# Altium PCB rpi_pico_2_hat.PcbDoc (part 1 of 2)
Units mil, origin at the board's own origin, x right, y up, seen from the top; angles counter-clockwise.
Board outline 970.71 x 2205.08 mil, 4 copper layers (Top Layer, Ground Plane, Middle Layer, Bottom Layer), stack 61.368 mil thick; 73 components, 64 nets, 231 pads, 151 vias.
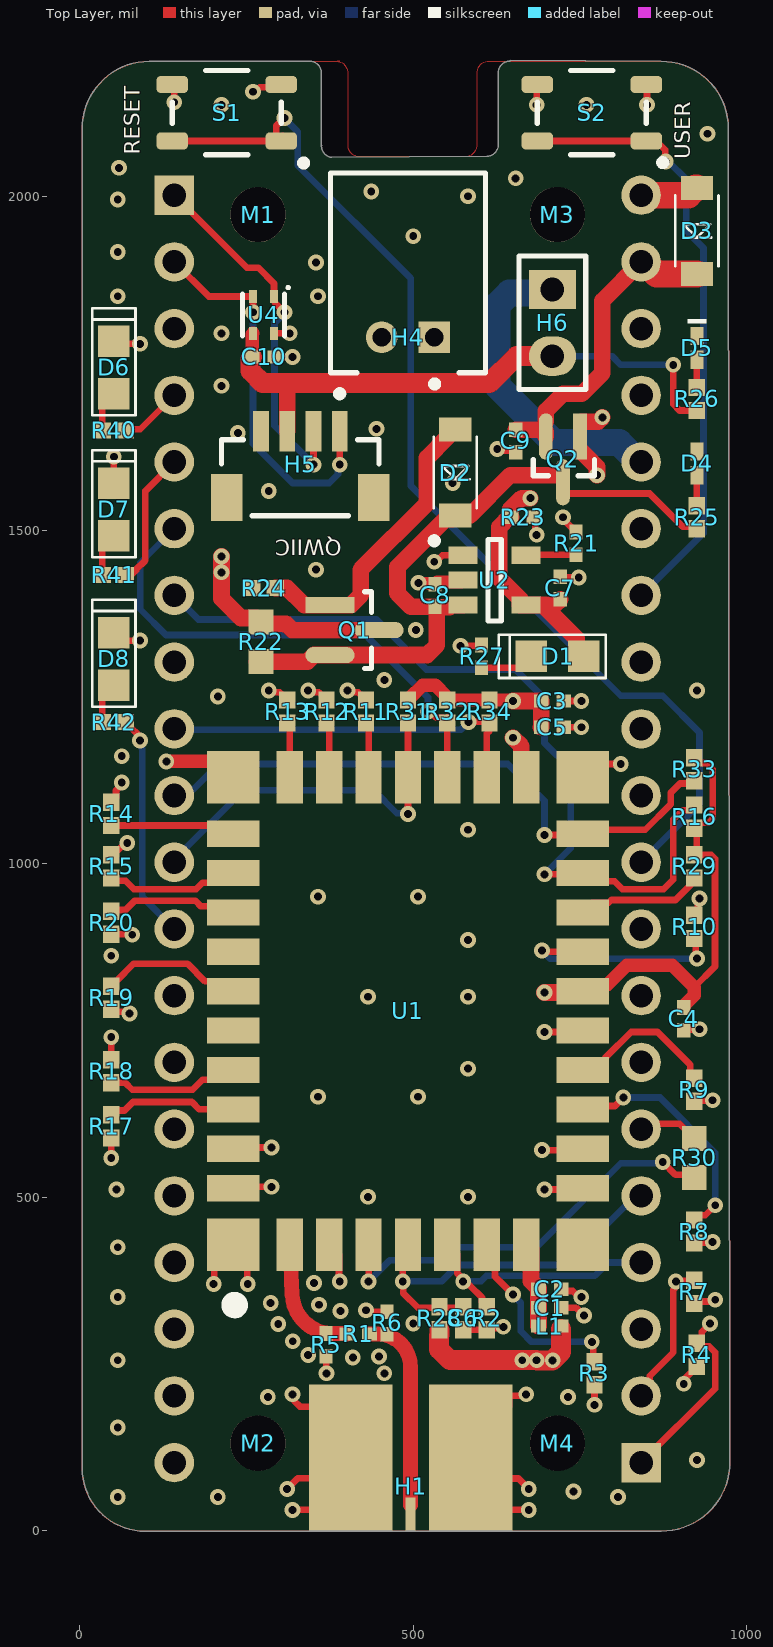
[diagram p0: Top Layer view]
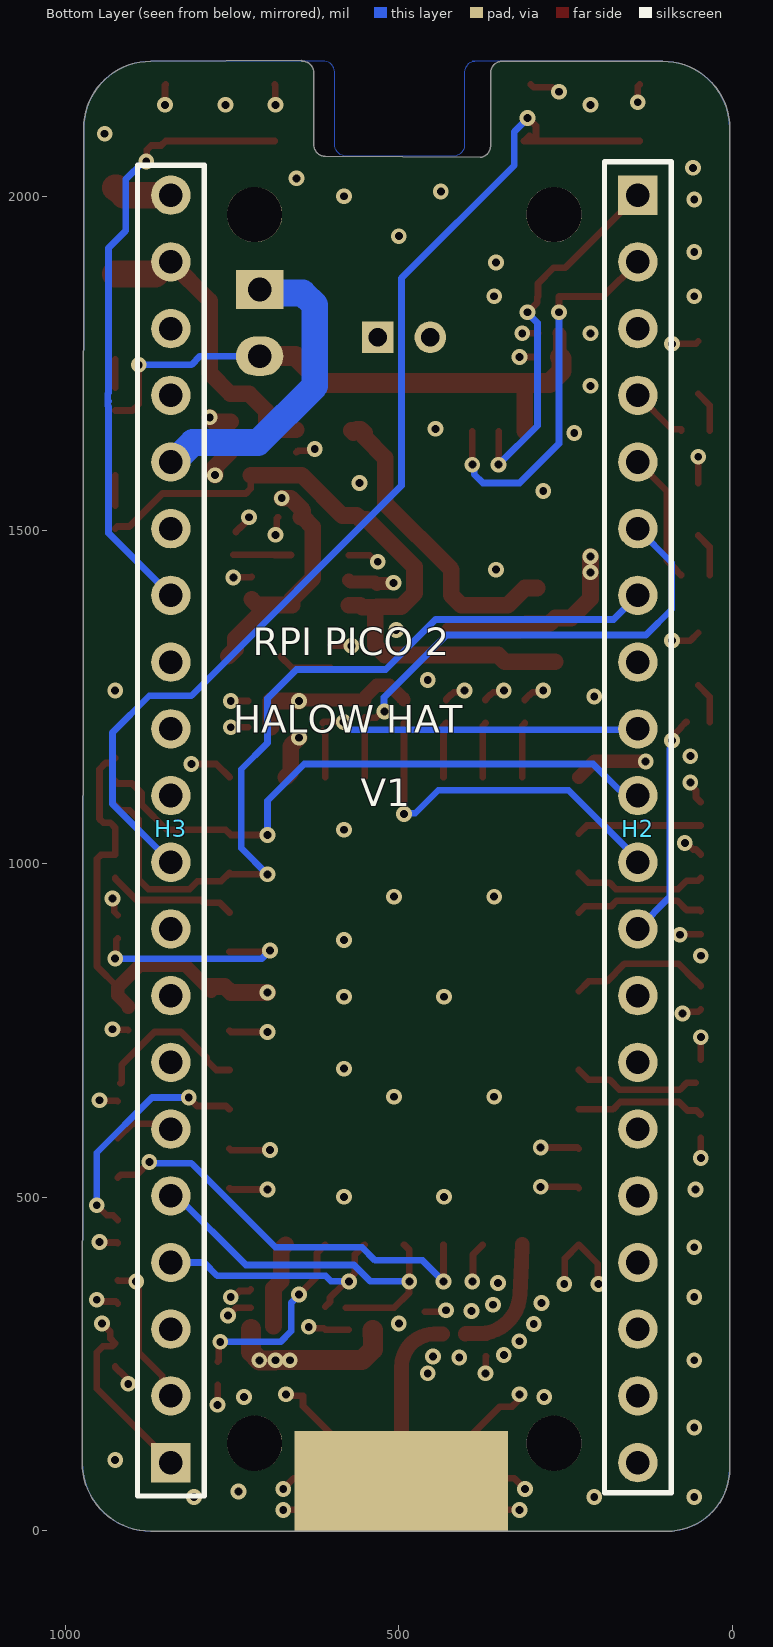
[diagram p1: Bottom Layer view, seen from below]
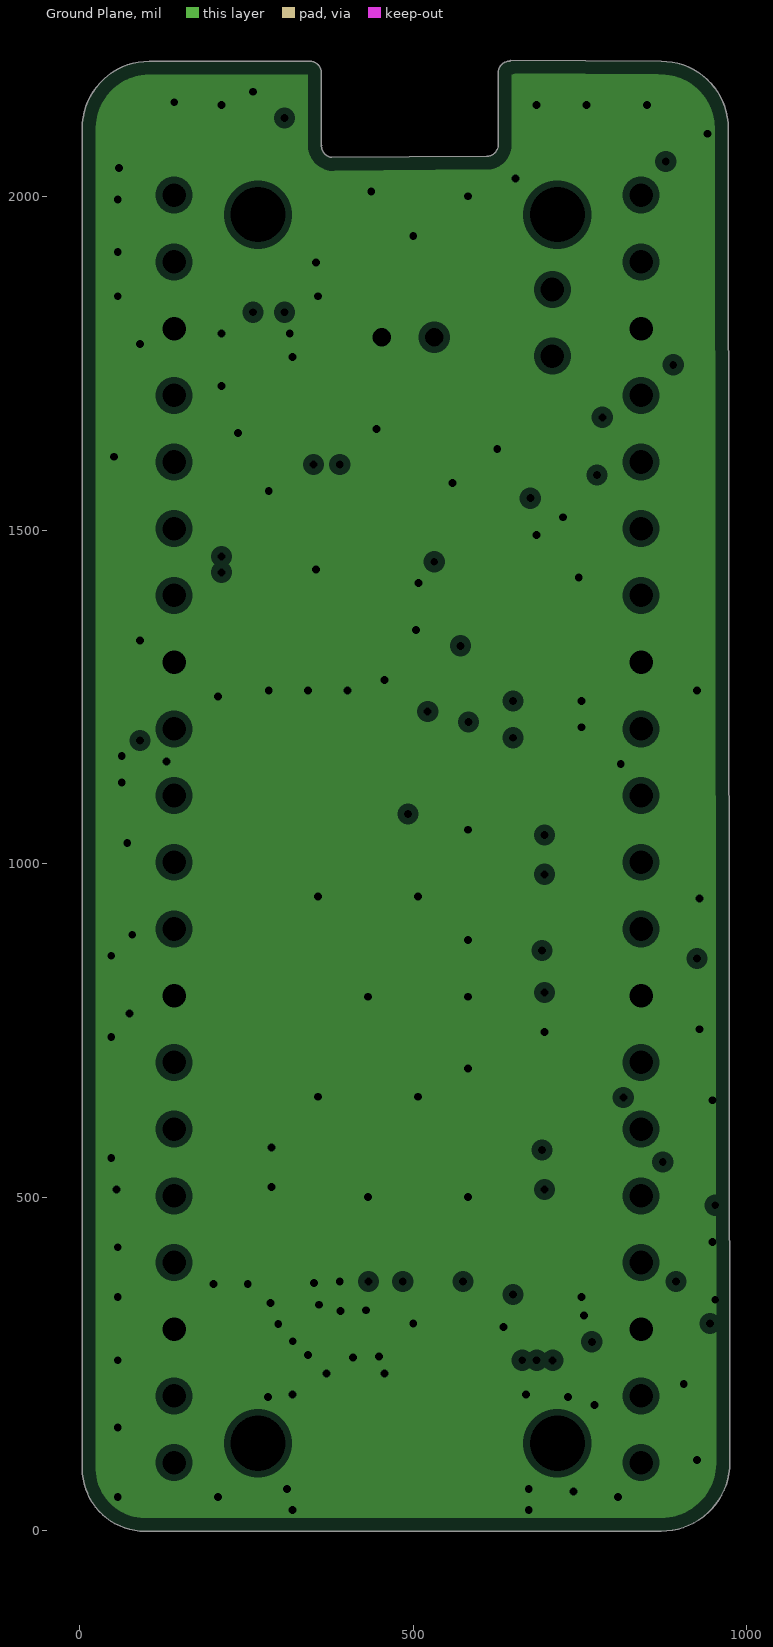
[diagram p2: Ground Plane, clearances drawn from the general rule]
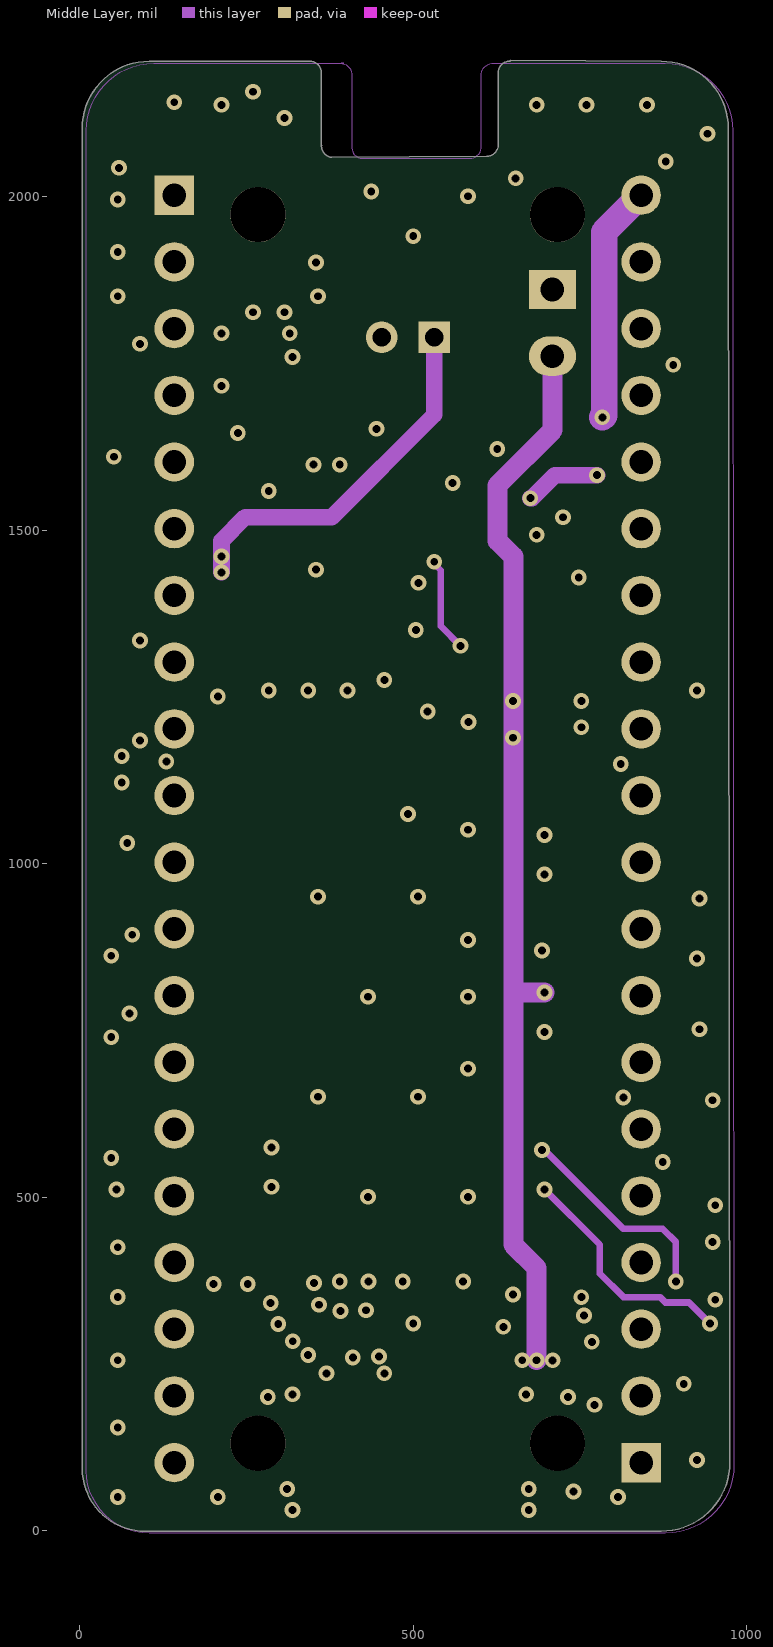
[diagram p3: Middle Layer]

## Layer stack, top to bottom
Top Solder: solder mask 0.8, SM-001, Dk 4.2
Top Layer: signal copper 1.378
Dielectric 2: prepreg 16.117, PP-006, Dk 4.29
Ground Plane: plane copper 1.378, net GND
Dielectric 1: prepreg 23.622, Core, Dk 4.29
Middle Layer: signal copper 1.378
Dielectric 5: prepreg 16.117, PP-006, Dk 4.29
Bottom Layer: signal copper 1.378
Bottom Solder: solder mask 0.8, SM-001, Dk 4.2

## Board outline
3.84,93.63 3.84,2102.36 cw(c104.56,2102.36) 104.56,2203.08 346.46,2203.08 cw(c345.31,2186.19) 362.2,2185.04 362.2,2074.8 362.51,2077.07 ccw(c379.41,2075.93) 377.95,2059.06 377.95,2058.93 610.08,2060.65 610.08,2060.53 ccw(c609.75,2078.41) 627.63,2078.74 627.63,2187.33 cw(c644.52,2186.19) 645.67,2203.08 645.68,2204.62 871.72,2203.08 cw(c871.72,2102.36) 972.44,2102.36 974.55,102.36 cw(c871.72,102.36) 871.72,-0.46 97.93,-0.46 cw(c97.93,93.63)

## Design rules (kind name [scope] priority, off if disabled: settings)
AssemblyTestPointUsage [All] p0: scope1count=1 scope1_0_kind=Board scope1_0_value=Board scope2count=1 scope2_0_kind=Board scope2_0_value=Board commentlength=0
AssemblyTestPointUsage [All] p1: allowmultiple=TRUE
AssemblyTestpoint [All] p0: scope1count=1 scope1_0_kind=Board scope1_0_value=Board scope2count=1 scope2_0_kind=Board scope2_0_value=Board commentlength=0
AssemblyTestpoint [All] p1: testpointundercomponent=TRUE minsize=40 maxsize=100 preferedsize=60 minholesize=0 maxholesize=40 preferedholesize=32 testpointgrid=1 usegrid=FALSE gridtolerance=0.01 allowsidetop=TRUE
BoardOutlineClearance [All] p0 off: scope1count=1 scope1_0_kind=Board scope1_0_value=Board scope2count=1 scope2_0_kind=Board scope2_0_value=Board commentlength=140 gap=15 // Protel DXP Scope 1 Expression Was: (not OnTopSilkscreen) AND (NOT OnBottomSilkscreen) and (not OnMultiLayer) and (not InComponent('H1'))
BoardOutlineClearance [(not OnTopSilkscreen) AND (NOT OnBottomSilkscreen) and (not OnMultiLayer) and (not InComponent('H1'))] p1: gap=15 ignorepadtopadclearanceinfootprint=FALSE
Clearance Clearance_1 [All] p0: scope1count=1 scope1_0_kind=Board scope1_0_value=Board scope2count=1 scope2_0_kind=Board scope2_0_value=Board commentlength=0 gap=6
Clearance Clearance_USB [All] p0 off: scope1count=1 scope1_0_kind=Board scope1_0_value=Board scope2count=1 scope2_0_kind=Board scope2_0_value=Board commentlength=65 gap=6 // Protel DXP Scope 1 Expression Was: InDifferentialPair('USBC')
Clearance Clearance_RF [All] p0: scope1count=1 scope1_0_kind=NetClass scope1_0_value="50 Ohms" scope2count=1 scope2_0_kind=Board scope2_0_value=Board commentlength=0 gap=10
Clearance Clearance_RF_Poly [All] p0 off: scope1count=1 scope1_0_kind=Board scope1_0_value=Board scope2count=1 scope2_0_kind=NetClass scope2_0_value=RF-Net commentlength=50 gap=10 // Protel DXP Scope 1 Expression Was: (InPolygon)
Clearance Clearance_RF_Poly [(InPolygon) vs InNetClass('RF-Net')] p1: gap=10 ignorepadtopadclearanceinfootprint=TRUE
Clearance Clearance_RF [InNetClass('50 Ohms')] p2: gap=10 ignorepadtopadclearanceinfootprint=TRUE
Clearance Clearance_USB [InDifferentialPair('USBC')] p3: gap=6 ignorepadtopadclearanceinfootprint=TRUE
Clearance Clearance_1 [All] p4: gap=6 ignorepadtopadclearanceinfootprint=TRUE
ComponentClearance [All] p0: scope1count=1 scope1_0_kind=Board scope1_0_value=Board scope2count=1 scope2_0_kind=Board scope2_0_value=Board commentlength=0 gap=10 collisioncheckmode=3
DiffPairsRouting DiffPairsRouting_USBC [All] p0 off: scope1count=1 scope1_0_kind=Board scope1_0_value=Board scope2count=1 scope2_0_kind=Board scope2_0_value=Board commentlength=65 // Protel DXP Scope 1 Expression Was: InDifferentialPair('USBC')
DiffPairsRouting DiffPairsRouting_USBC [InDifferentialPair('USBC')] p1 off: maxlimit=10 minlimit=5 mostfreqgap=10 toplayer_maxgap=6 toplayer_prefgap=6 toplayer_minwidth=7.75 toplayer_maxwidth=11 toplayer_prefwidth=10.26 midlayer1_minwidth=15 midlayer1_maxwidth=15 midlayer1_prefwidth=15 bottomlayer_minwidth=15 bottomlayer_maxwidth=15 bottomlayer_prefwidth=15 impedanceprofiledriven=TRUE maxuncoupledlength=500
FabricationTestPointUsage [All] p0 off: scope1count=1 scope1_0_kind=Board scope1_0_value=Board scope2count=1 scope2_0_kind=Board scope2_0_value=Board commentlength=0 valid=0 allowmultiple=FALSE
FabricationTestPointUsage [All] p1 off: valid=0 allowmultiple=FALSE
FabricationTestpoint [All] p0 off: scope1count=1 scope1_0_kind=Board scope1_0_value=Board scope2count=1 scope2_0_kind=Board scope2_0_value=Board commentlength=63 side=1 testpointundercomponent=TRUE minsize=40 maxsize=100 preferedsize=60 minholesize=0 maxholesize=40 preferedholesize=32 testpointgrid=1 // Protel DXP Scope 1 Expression Was: (IsPad And OnMultiLayer)
FabricationTestpoint [(IsPad And OnMultiLayer)] p1 off: side=1 testpointundercomponent=TRUE minsize=40 maxsize=100 preferedsize=60 minholesize=0 maxholesize=40 preferedholesize=32 testpointgrid=1 allowsidetop=TRUE usegrid=TRUE gridtolerance=0.01
FanoutControl Fanout_Default [All] p0 off: scope1count=1 scope1_0_kind=Board scope1_0_value=Board scope2count=1 scope2_0_kind=Board scope2_0_value=Board commentlength=30 // Fanout_Default (Default Rule)
FanoutControl Fanout_Small [All] p0 off: scope1count=1 scope1_0_kind=Board scope1_0_value=Board scope2count=1 scope2_0_kind=Board scope2_0_value=Board commentlength=84 // Protel DXP Scope 1 Expression Was: (CompPinCount < 5)   Fanout_Small (Default Rule)
FanoutControl Fanout_SOIC [All] p0 off: scope1count=1 scope1_0_kind=Board scope1_0_value=Board scope2count=1 scope2_0_kind=Board scope2_0_value=Board commentlength=71 // Protel DXP Scope 1 Expression Was: IsSOIC   Fanout_SOIC (Default Rule)
FanoutControl Fanout_LCC [All] p0 off: scope1count=1 scope1_0_kind=Board scope1_0_value=Board scope2count=1 scope2_0_kind=Board scope2_0_value=Board commentlength=69 // Protel DXP Scope 1 Expression Was: IsLCC   Fanout_LCC (Default Rule)
FanoutControl Fanout_BGA [All] p0 off: scope1count=1 scope1_0_kind=Board scope1_0_value=Board scope2count=1 scope2_0_kind=Board scope2_0_value=Board commentlength=69 // Protel DXP Scope 1 Expression Was: IsBGA   Fanout_BGA (Default Rule)
FanoutControl Fanout_BGA [IsBGA] p1 off: bgadir=Out bgaviamode=Centered fanoutstyle=Auto fanoutdirection=Alternating viagrid=1 // Fanout_BGA (Default Rule)
FanoutControl Fanout_LCC [IsLCC] p2 off: bgadir=Out bgaviamode=Centered fanoutstyle=Auto fanoutdirection=Alternating viagrid=1 // Fanout_LCC (Default Rule)
FanoutControl Fanout_SOIC [IsSOIC] p3 off: bgadir=Out bgaviamode=Centered fanoutstyle=Auto fanoutdirection=Alternating viagrid=1 // Fanout_SOIC (Default Rule)
FanoutControl Fanout_Small [(CompPinCount < 5)] p4 off: bgadir=Out bgaviamode=Centered fanoutstyle=Auto fanoutdirection=OutThenIn viagrid=1 // Fanout_Small (Default Rule)
FanoutControl Fanout_Default [All] p5 off: bgadir=Out bgaviamode=Centered fanoutstyle=Auto fanoutdirection=Alternating viagrid=1 // Fanout_Default (Default Rule)
Height [All] p0 off: scope1count=1 scope1_0_kind=Board scope1_0_value=Board scope2count=1 scope2_0_kind=Board scope2_0_value=Board commentlength=0
Height "Under Socket" [All] p0 off: scope1count=1 scope1_0_kind=Board scope1_0_value=Board scope2count=1 scope2_0_kind=Board scope2_0_value=Board commentlength=64 // Protel DXP Scope 1 Expression Was: WithinRoom('ROOM_SOCKET')
Height "POGO Pins" [All] p0: scope1count=1 scope1_0_kind=ComponentClass scope1_0_value=POGO scope2count=1 scope2_0_kind=Board scope2_0_value=Board commentlength=0
Height TP1 [All] p0: scope1count=1 scope1_0_kind=Component scope1_0_value=TP1 scope2count=1 scope2_0_kind=Board scope2_0_value=Board commentlength=0
Height TP1 [InComponent('TP1')] p1: minheight=0 maxheight=472.44 prefheight=118.11
Height "POGO Pins" [InComponentClass('POGO')] p2: minheight=0 maxheight=275.59 prefheight=196.85
Height "Under Socket" [WithinRoom('ROOM_SOCKET')] p3: minheight=0 maxheight=157.48 prefheight=118.11
Height [All] p4 off: minheight=0 maxheight=1000 prefheight=500
HoleSize [All] p0: scope1count=1 scope1_0_kind=Board scope1_0_value=Board scope2count=1 scope2_0_kind=Board scope2_0_value=Board commentlength=0 absolutevalues=TRUE maxlimit=200 minlimit=6 maxpercent=80.000 minpercent=20.000
HoleSize [All] p1: absolutevalues=TRUE maxlimit=200 minlimit=6 maxpercent=80.000 minpercent=20.000
HoleToHoleClearance [All] p0: scope1count=1 scope1_0_kind=Board scope1_0_value=Board scope2count=1 scope2_0_kind=Board scope2_0_value=Board commentlength=0
HoleToHoleClearance [All] p1: gap=8 allowstackedmicrovias=TRUE
LayerPairs [All] p0 off: scope1count=1 scope1_0_kind=Board scope1_0_value=Board scope2count=1 scope2_0_kind=Board scope2_0_value=Board commentlength=0 enforce=TRUE
LayerPairs [All] p1 off: enforce=TRUE
MatchedLengths SDIO_2 [All] p0: scope1count=1 scope1_0_kind=NetClass scope1_0_value=SDIO_2 scope2count=1 scope2_0_kind=Board scope2_0_value=Board commentlength=0 tolerance=2000 amplitude=200 gap=20 style=90-Degree
MatchedLengths DCMI [All] p0: scope1count=1 scope1_0_kind=NetClass scope1_0_value=DCMI scope2count=1 scope2_0_kind=Board scope2_0_value=Board commentlength=0 tolerance=1000 amplitude=200 gap=20 style=90-Degree
MatchedLengths SDIO [All] p0: scope1count=1 scope1_0_kind=NetClass scope1_0_value=SDIO scope2count=1 scope2_0_kind=Board scope2_0_value=Board commentlength=0 tolerance=2000 amplitude=200 gap=20 style=90-Degree
MatchedLengths MatchLengths_U1_Passives_J5 [All] p0 off: scope1count=1 scope1_0_kind=Board scope1_0_value=Board scope2count=1 scope2_0_kind=Board scope2_0_value=Board commentlength=98 tolerance=50 amplitude=200 gap=20 style=90-Degree // Protel DXP Scope 1 Expression Was: InxSignalClass('xSignals_U1_Passives_J5_MatchLengthsClass')
MatchedLengths MatchLengths_U1_Passives_J5_1 [All] p0 off: scope1count=1 scope1_0_kind=Board scope1_0_value=Board scope2count=1 scope2_0_kind=Board scope2_0_value=Board commentlength=100 tolerance=50 amplitude=200 gap=20 style=90-Degree // Protel DXP Scope 1 Expression Was: InxSignalClass('xSignals_U1_Passives_J5_MatchLengthsClass_1')
MatchedLengths DCMI [InNetClass('DCMI')] p1: tolerance=1000 checknetsindiffpair=FALSE checkdiffpairvsdiffpair=TRUE checkxsignals=TRUE checkothers=TRUE
MatchedLengths SDIO [InNetClass('SDIO')] p2: tolerance=2000 checknetsindiffpair=FALSE checkdiffpairvsdiffpair=TRUE checkxsignals=TRUE checkothers=TRUE
MatchedLengths SDIO_2 [InNetClass('SDIO_2')] p3: tolerance=2000 checknetsindiffpair=FALSE checkdiffpairvsdiffpair=TRUE checkxsignals=TRUE checkothers=TRUE
MatchedLengths MatchLengths_U1_Passives_J5_1 [InxSignalClass('xSignals_U1_Passives_J5_MatchLengthsClass_1')] p4: tolerance=50 checknetsindiffpair=FALSE checkdiffpairvsdiffpair=TRUE checkxsignals=TRUE checkothers=TRUE
MatchedLengths MatchLengths_U1_Passives_J5 [InxSignalClass('xSignals_U1_Passives_J5_MatchLengthsClass')] p5: tolerance=50 checknetsindiffpair=FALSE checkdiffpairvsdiffpair=TRUE checkxsignals=TRUE checkothers=TRUE
MinimumSolderMaskSliver [All] p0 off: scope1count=1 scope1_0_kind=Board scope1_0_value=Board scope2count=1 scope2_0_kind=Board scope2_0_value=Board commentlength=96 // Protel DXP Scope 1 Expression Was: not InComponent('U4','U1','U5','U6','U7','U8','U9','U10')
MinimumSolderMaskSliver [not InComponent('U4','U1','U5','U6','U7','U8','U9','U10')] p1: minsoldermaskwidth=1
NetAntennae [All] p0: scope1count=1 scope1_0_kind=Board scope1_0_value=Board scope2count=1 scope2_0_kind=Board scope2_0_value=Board commentlength=0
PasteMaskExpansion [All] p0: scope1count=1 scope1_0_kind=Board scope1_0_value=Board scope2count=1 scope2_0_kind=Board scope2_0_value=Board commentlength=0 expansion=0
PlaneClearance [All] p0: scope1count=1 scope1_0_kind=Board scope1_0_value=Board scope2count=1 scope2_0_kind=Board scope2_0_value=Board commentlength=0 clearance=10
PlaneClearance [All] p1: clearance=10
PlaneConnect [All] p0: scope1count=1 scope1_0_kind=Board scope1_0_value=Board scope2count=1 scope2_0_kind=Board scope2_0_value=Board commentlength=0 planeconnectstyle=Relief reliefexpansion=20 reliefentries=4 reliefconductorwidth=10 reliefairgap=10
PlaneConnect PlaneConnect_1 [All] p0 off: scope1count=1 scope1_0_kind=Board scope1_0_value=Board scope2count=1 scope2_0_kind=Board scope2_0_value=Board commentlength=166 planeconnectstyle=Relief reliefexpansion=15.75 reliefentries=4 reliefconductorwidth=10 reliefairgap=7.87 // Protel DXP Scope 1 Expression Was: (InComponent('J5') OR InComponent('J6') OR InComponent('J13') OR InComponent('J11') OR InComponent('J12')) OR InComponent('H3')
PlaneConnect PlaneConnect_1 [(InComponent('J5') OR InComponent('J6') OR InComponent('J13') OR InComponent('J11') OR InComponent('J12')) OR InComponent('H3')] p1: planeconnectstyle=Relief reliefexpansion=15.75 reliefentries=4 reliefconductorwidth=10 reliefairgap=7.87
PlaneConnect [All] p2: pad.planeconnectstyle=Relief pad.reliefexpansion=20 pad.reliefentries=4 pad.reliefconductorwidth=10 pad.reliefairgap=10 via.planeconnectstyle=Direct via.reliefexpansion=20 via.reliefentries=4 via.reliefconductorwidth=10 via.reliefairgap=10
PolygonConnect [All] p0: scope1count=1 scope1_0_kind=Board scope1_0_value=Board scope2count=1 scope2_0_kind=Board scope2_0_value=Board commentlength=0 connectstyle=Relief reliefconductorwidth=10 reliefentries=4 polygonreliefangle="90 Angle"
PolygonConnect PolygonConnect_1 [All] p0 off: scope1count=1 scope1_0_kind=Net scope1_0_value=GND scope2count=1 scope2_0_kind=Board scope2_0_value=Board commentlength=145 connectstyle=Relief reliefconductorwidth=10 reliefentries=4 polygonreliefangle="90 Angle" // Protel DXP Scope 2 Expression Was: (InComponent('J5') OR InComponent('J6') OR InComponent('J13') OR InComponent('J11') OR InComponent('J12'))
PolygonConnect PolygonConnect_1 [InNet('GND') vs (InComponent('J5') OR InComponent('J6') OR InComponent('J13') OR InComponent('J11') OR InComponent('J12'))] p1: connectstyle=Relief reliefconductorwidth=10 reliefentries=4 polygonreliefangle="90 Angle" airgapwidth=7.87
PolygonConnect [All] p2: thpad.connectstyle=Relief thpad.reliefconductorwidth=10 thpad.reliefentries=4 thpad.polygonreliefangle="90 Angle" thpad.airgapwidth=10 smdpad.connectstyle=Direct smdpad.reliefconductorwidth=10 smdpad.reliefentries=4 smdpad.polygonreliefangle="90 Angle" smdpad.airgapwidth=10 via.connectstyle=Direct via.reliefconductorwidth=10 via.reliefentries=4 via.polygonreliefangle="90 Angle" via.airgapwidth=10
RoutingCorners [All] p0: scope1count=1 scope1_0_kind=Board scope1_0_value=Board scope2count=1 scope2_0_kind=Board scope2_0_value=Board commentlength=0 cornerstyle=45-Degree minsetback=100 maxsetback=100
RoutingLayers [All] p0: scope1count=1 scope1_0_kind=Board scope1_0_value=Board scope2count=1 scope2_0_kind=Board scope2_0_value=Board commentlength=0 top layer=Automatic mid layer 1=Automatic bottom layer=Automatic
RoutingPriority [All] p0: scope1count=1 scope1_0_kind=Board scope1_0_value=Board scope2count=1 scope2_0_kind=Board scope2_0_value=Board commentlength=0
RoutingTopology [All] p0: scope1count=1 scope1_0_kind=Board scope1_0_value=Board scope2count=1 scope2_0_kind=Board scope2_0_value=Board commentlength=0 topology=Shortest
RoutingVias [All] p0: scope1count=1 scope1_0_kind=Board scope1_0_value=Board scope2count=1 scope2_0_kind=Board scope2_0_value=Board commentlength=0 holewidth=11.81 width=23.62 viastyle="Through Hole" minholewidth=8 minwidth=19.68 maxholewidth=28 maxwidth=50
RoutingVias [All] p1: holewidth=11.81 width=23.62 viastyle="Through Hole" minholewidth=8 minwidth=19.68 maxholewidth=28 maxwidth=50
ShortCircuit [All] p0: scope1count=1 scope1_0_kind=Board scope1_0_value=Board scope2count=1 scope2_0_kind=Board scope2_0_value=Board commentlength=0 allowed=FALSE
SilkToBoardRegionClearance [All] p0: scope1count=1 scope1_0_kind=Board scope1_0_value=Board scope2count=1 scope2_0_kind=Board scope2_0_value=Board commentlength=0
SilkToSilkClearance [All] p0: scope1count=1 scope1_0_kind=Board scope1_0_value=Board scope2count=1 scope2_0_kind=Board scope2_0_value=Board commentlength=0
SilkToSilkClearance [All] p1: silktosilkclearance=8
SilkToSolderMaskClearance [All] p0 off: scope1count=1 scope1_0_kind=Board scope1_0_value=Board scope2count=1 scope2_0_kind=Board scope2_0_value=Board commentlength=44 // Protel DXP Scope 1 Expression Was: IsPad
SilkToSolderMaskClearance [IsPad] p1: minsilkscreentomaskgap=4 clearancetoexposedcopper=TRUE
SolderMaskExpansion [All] p0: scope1count=1 scope1_0_kind=Board scope1_0_value=Board scope2count=1 scope2_0_kind=Board scope2_0_value=Board commentlength=0 expansion=4
SolderMaskExpansion [All] p1: expansion=4 istentingtop=FALSE
SupplyNets [All] p0: scope1count=1 scope1_0_kind=Net scope1_0_value=GND scope2count=1 scope2_0_kind=Board scope2_0_value=Board commentlength=0 voltage=0.000
SupplyNets SupplyNets_7 [All] p0: scope1count=1 scope1_0_kind=Net scope1_0_value=VDD_PA scope2count=1 scope2_0_kind=Board scope2_0_value=Board commentlength=0 voltage=4.000
SupplyNets SupplyNets_6 [All] p0: scope1count=1 scope1_0_kind=Net scope1_0_value=VDD_LNA scope2count=1 scope2_0_kind=Board scope2_0_value=Board commentlength=0 voltage=4.000
SupplyNets SupplyNets_5 [All] p0: scope1count=1 scope1_0_kind=Net scope1_0_value=VDD_FEM scope2count=1 scope2_0_kind=Board scope2_0_value=Board commentlength=0 voltage=4.000
SupplyNets SupplyNets_4 [All] p0: scope1count=1 scope1_0_kind=Net scope1_0_value=VDD5_RPi scope2count=1 scope2_0_kind=Board scope2_0_value=Board commentlength=0 voltage=5.000
SupplyNets SupplyNets_3 [All] p0: scope1count=1 scope1_0_kind=Net scope1_0_value=VDD5 scope2count=1 scope2_0_kind=Board scope2_0_value=Board commentlength=0 voltage=5.000
SupplyNets SupplyNets_2 [All] p0: scope1count=1 scope1_0_kind=Net scope1_0_value=VBAT scope2count=1 scope2_0_kind=Board scope2_0_value=Board commentlength=0 voltage=3.300
SupplyNets SupplyNets_1 [All] p0: scope1count=1 scope1_0_kind=Net scope1_0_value=VDD33 scope2count=1 scope2_0_kind=Board scope2_0_value=Board commentlength=0 voltage=3.300
SupplyNets SupplyNets_1 [InNet('VDD33')] p1: voltage=3.300
SupplyNets SupplyNets_2 [InNet('VBAT')] p2: voltage=3.300
SupplyNets SupplyNets_3 [InNet('VDD5')] p3: voltage=5.000
SupplyNets SupplyNets_4 [InNet('VDD5_RPi')] p4: voltage=5.000
SupplyNets SupplyNets_5 [InNet('VDD_FEM')] p5: voltage=4.000
SupplyNets SupplyNets_6 [InNet('VDD_LNA')] p6: voltage=4.000
SupplyNets SupplyNets_7 [InNet('VDD_PA')] p7: voltage=4.000
SupplyNets [InNet('GND')] p8: voltage=0.000
UnConnectedPin [All] p0 off: scope1count=1 scope1_0_kind=Board scope1_0_value=Board scope2count=1 scope2_0_kind=Board scope2_0_value=Board commentlength=0
UnConnectedPin [All] p1 off:
UnRoutedNet [All] p0: scope1count=1 scope1_0_kind=Board scope1_0_value=Board scope2count=1 scope2_0_kind=Board scope2_0_value=Board commentlength=0
UnRoutedNet [All] p1: checkbadconnections=TRUE
UnpouredPolygon [All] p0: scope1count=1 scope1_0_kind=Board scope1_0_value=Board scope2count=1 scope2_0_kind=Board scope2_0_value=Board commentlength=0
Width "RF Width_1" [All] p0 off: scope1count=1 scope1_0_kind=Board scope1_0_value=Board scope2count=1 scope2_0_kind=Board scope2_0_value=Board commentlength=65 maxlimit=23.62 minlimit=4.18 preferedwidth=10.24 // Protel DXP Scope 1 Expression Was: InDifferentialPair('USBC')
Width [All] p0: scope1count=1 scope1_0_kind=Board scope1_0_value=Board scope2count=1 scope2_0_kind=Board scope2_0_value=Board commentlength=0 maxlimit=50 minlimit=8 preferedwidth=8
Width "RF Width" [All] p0: scope1count=1 scope1_0_kind=NetClass scope1_0_value="50 OHMs" scope2count=1 scope2_0_kind=Board scope2_0_value=Board commentlength=0 maxlimit=23.62 minlimit=4.18 preferedwidth=10
Width "RF Width" [InNetClass('50 OHMs')] p1: maxlimit=23.62 minlimit=4.18 preferedwidth=10 toplayer_minwidth=12.51 toplayer_prefwidth=22.3 impedanceprofiledriven=TRUE impedanceprofileid={FF55CEB2-EE64-462C-BC0D-290E837BE369} impedanceprofilevalue=50.000000 minimp=50.000000 maximp=50.000000 favimp=50.000000
Width "RF Width_1" [InDifferentialPair('USBC')] p2: maxlimit=23.62 minlimit=4.18 preferedwidth=10.24 toplayer_minwidth=7 minimp=50.000000 maximp=50.000000 favimp=50.000000
Width [All] p3: maxlimit=50 minlimit=8 preferedwidth=8
10 further rules are at their usual default settings.

## Classes and differential pairs
net class "50 OHMs": ANT NetH1_1

## Components (designator, comment, footprint, x,y, rotation, side; value= is the part's Value field where it differs from the comment)
C1 "CL05A106MP8NUB8" 0402_cap 704.72,334.65 r0 top
C2 "C1005X7R1H104K050BE" 0402_cap 704.72,362.2 r0 top
C3 "C1005X7R1H104K050BE" 0402_cap 708.66,1244.09 r0 top
C4 "CL05A106MP8NUB8" 0402_cap 905.51,767.72 r270 top
C5 "C1005X7R1H104K050BE" 0402_cap 708.66,1204.72 r0 top
C6 "CAP" CAPC1005X06N 574.8,318.9 r270 top
C7 "C1005X5R0J475K050BC" 0402_cap 720.47,1413.39 r90 top
C8 "C1005X5R0J475K050BC" 0402_cap 532.69,1402.3 r90 top
C9 "C1005X7R1H104K050BE" 0402_cap 653.54,1633.86 r90 top
C10 "C1005X7R1H104K050BE" 0402_cap 275.59,1759.84 r180 top
D1 "LTST-C170KRKT" LED_0805_RED 716.54,1311.02 r180 top
D2 "MMSZ5231B7F" SOD-123FL 562.99,1586.61 r90 top
D3 "MBR0530T3G" SOD-123FL 925.2,1948.82 r90 top
D4 "XZVGR68W-3" LED_0402_GREEN 925.2,1600.39 r90 top
D5 "XZVGR68W-3" LED_0402_GREEN 925.2,1773.62 r90 top
D6 "LTST-C170KRKT" LED_0805_RED 51.18,1744.09 r90 top
D7 "LTST-C170KGKT" LED_0805_GREEN 51.18,1531.5 r90 top
D8 "LTST-C170TBKT" LED_0805_BLUE 51.18,1307.09 r90 top
H1 "142-0761-861" SMA_EMERSON_142_0761_861 496.06,-0.2 r180 top
H2 "1x20 Female Header" HDR1X20F 141.7,2002.36 r270 bottom
H3 "1x20 Female Header" HDR1X20F 841.7,102.36 r90 bottom
H4 "S2B-PH-K-S(LF)(SN)" JST-S2B-PH-K-S_V 492.13,1885.83 r180 top
H5 "BM04B-SRSS-TB" FP-BM04B-SRSS-TBT_LF_SN-MFG 330.71,1578.74 r180 top
H6 "2011-1X02G00SB-1" HDR1X2 708.66,1811.02 r270 top
L1 "BLM15PX600SN1D" 0402_ind 704.72,307.09 r0 top
M1 "PAD0009" MH_300_275_NPTH 267.29,1973.23 r0 top
M2 "PAD0009" MH_300_275_NPTH 267.29,131.49 r0 top
M3 "PAD0009" MH_300_275_NPTH 716.11,1973.23 r0 top
M4 "PAD0009" MH_300_275_NPTH 716.11,131.49 r0 top
Q1 "IRLML6401TRPBF" FP-SOT23-IPC_A 412,1350.39 r0 top
Q2 "NTS4101PT1G" FP-419-04-IPC_A 724.41,1606.3 r270 top
R1 "RC0402JR-070RL" 0402_res 417.32,295.28 r0 top
R2 "ERJ-2RKF1002X" RESC1005X04N 610.24,318.9 r90 top
R3 "ERJ-2RKF1002X" RESC1005X04N 771.65,236.22 r90 top
R4 "ERJ-2RKF1002X" RESC1005X04N 925.2,263.78 r90 top
R5 "RC0402JR-070RL" 0402_res 369.24,279.06 r270 top
R6 "RC0402JR-070RL" 0402_res 460.71,311.7 r90 top
R7 "ERJ-2RKF1002X" RESC1005X04N 921.26,358.27 r90 top
R8 "ERJ-2RKF1002X" RESC1005X04N 921.26,448.82 r90 top
R9 "ERJ-2RKF1002X" RESC1005X04N 921.26,661.42 r90 top
R10 "ERJ-2RKF1002X" RESC1005X04N 921.26,905.51 r270 top
R11 "ERJ-2RKF1002X" RESC1005X04N 429.13,1228.35 r270 top
R12 "ERJ-2RKF1002X" RESC1005X04N 370.08,1228.35 r270 top
R13 "ERJ-2RKF1002X" RESC1005X04N 311.02,1228.35 r270 top
R14 "ERJ-2RKF1002X" RESC1005X04N 47.24,1074.8 r270 top
R15 "ERJ-2RKF1002X" RESC1005X04N 47.24,996.06 r270 top
R16 "MCR01MZPF4702" RESC1005X04N 921.26,1070.87 r90 top
R17 "ERJ-2RKF1002X" RESC1005X04N 47.24,606.3 r270 top
R18 "ERJ-2RKF1002X" RESC1005X04N 47.24,688.98 r90 top
R19 "ERJ-2RKF1002X" RESC1005X04N 47.24,799.21 r270 top
R20 "ERJ-2RKF1002X" RESC1005X04N 47.24,911.81 r270 top
R21 "RC0402FR-072KL" 0402_res 744.09,1480.31 r90 top
R22 "RC0603JR-070RL" RESC1608X06N 271.65,1332.68 r270 top
R23 "RC0402FR-07100KL" 0402_res 664.1,1519.68 r0 top
R24 "RC0402FR-07330RL" RESC1005X04N 275.59,1413.39 r180 top
R25 "ERJ-2RKF1001X" RESC1005X04N 925.2,1519.68 r90 top
R26 "ERJ-2RKF1001X" RESC1005X04N 925.2,1696.85 r90 top
R27 "RC0402FR-07470RL" 0402_res 602.36,1311.02 r90 top
R28 "RES" RESC1005X04N 539.37,318.9 r90 top
R29 "MCR01MZPF4702" RESC1005X04N 921.26,996.06 r270 top
R30 "RES" RESC1608X06N 921.26,559.06 r90 top
R31 "MCR01MZPF4702" RESC1005X04N 492.13,1228.35 r270 top
R32 "MCR01MZPF4702" RESC1005X04N 551.18,1228.35 r270 top
R33 "MCR01MZPF4702" RESC1005X04N 921.26,1141.73 r270 top
R34 "MCR01MZPF4702" RESC1005X04N 614.17,1228.35 r270 top
R40 "ERJ-2RKF1001X" RESC1005X04N 51.31,1649.61 r180 top
R41 "ERJ-2RKF1001X" RESC1005X04N 51.31,1433.07 r180 top
R42 "ERJ-2RKF1001X" RESC1005X04N 51.31,1212.6 r180 top
S1 "PTS810 SJG 250 SMTR LFS" SW_PTS810 220.47,2125.98 r180 top
S2 "PTS810 SJG 250 SMTR LFS" SW_PTS810 767.72,2125.98 r180 top
U1 "MM6108-MF08651-US" MF04 492.13,779.53 r90 top
U2 "MCP73832T-2ATI/OT" SOT-23-OT5_N 622.05,1425.2 r0 top
U4 "SHT40-AD1B-R3" DFN140P150X59-4N 275.59,1822.83 r270 top

## Footprints (in the part's own frame and the unit in brackets; to place one, negate y for a bottom-side part, rotate by r counter-clockwise, add the part's x,y. Pads: shape width x height; smd on the part's side, far side on the other; paste and mask are expansions set on the pad)
0402_cap [mil]
  rect 22x20 smd: 1(-17,0) 2(17,0)
0402_ind [mil]
  rect 22x20 smd: 1(-17,0) 2(17,0)
0402_res [mil]
  rect 22x20 smd: 1(-17,0) 2(17,0)
CAPC1005X06N [mm] "Chip Capacitor, 2-Leads, Body 1.00x0.50mm, IPC Medium Density"
  rect 0.66x0.62 smd: 1(-0.44,0) 2(0.44,0)
DFN140P150X59-4N [mm] "DFN, 4-Leads, Body 1.50x1.50mm, Pitch 1.40mm, IPC Medium Density"
  rect 0.5x0.3 smd: 1(-0.7,0.4) 2(-0.7,-0.4) 3(0.7,-0.4) 4(0.7,0.4)
  silkscreen extent -1.09,-0.8 0.8,0.99
FP-419-04-IPC_A [mm]
  rect 1.765x0.522 smd paste+0 mask+0: 1(-0.871,0.65)
  rrect100% 1.765x0.522 smd paste+0 mask+0: 2(-0.871,-0.65) 3(0.871,0)
  silkscreen extent 0.02,-1.13 0.62,1.2
FP-BM04B-SRSS-TBT_LF_SN-MFG [mm]
  rect 0.6x1.55 smd paste+0 mask+0: 1(-1.5,-1.775) 2(-0.5,-1.775) 3(0.5,-1.775) 4(1.5,-1.775)
  rect 1.2x1.8 smd paste+0 mask+0: 5(-2.8,0.75) 6(2.8,0.75)
  silkscreen extent -3,-3.32 3,1.45
FP-SOT23-IPC_A [mm]
  rect 1.874x0.612 smd paste+0 mask+0: 1(-0.935,0.95)
  rrect100% 1.874x0.612 smd paste+0 mask+0: 2(-0.935,-0.95) 3(0.935,0)
  silkscreen extent 0.38,-1.46 0.65,1.46
HDR1X2 [mm] "Connector; Header; 2 Position"
  rect 1.5x1.8 hole 0.9: 1(-1.27,0)
  oval 1.5x1.8 hole 0.9: 2(1.27,0)
  silkscreen extent -2.54,-1.27 2.54,1.27
HDR1X20F [mm] "Connector; Header; 20 Position Female"
  rect 1.5x1.5 hole 0.9: 1(0,0)
  round 1.5 hole 0.9: 2(2.54,0) 3(5.08,0) 4(7.62,0) 5(10.16,0) 6(12.7,0) 7(15.24,0) 8(17.78,0) 9(20.32,0) 10(22.86,0) 11(25.4,0) 12(27.94,0) 13(30.48,0) 14(33.02,0) 15(35.56,0) 16(38.1,0) 17(40.64,0) 18(43.18,0) 19(45.72,0) 20(48.26,0)
  silkscreen extent -1.27,-1.27 49.4,1.27
JST-S2B-PH-K-S_V [mm] "THD, 2-Leads, Body 7.6x5.9mm, Pitch 2mm"
  rect 1.2x1.2 hole 0.7: 1(-1,2.45)
  round 1.2 hole 0.7: 2(1,2.45)
  silkscreen extent -2.95,-3.8 2.95,4.35
LED_0402_GREEN [mm]
  rect 0.7x0.5 smd: A(-0.45,0) K(0.45,0)
LED_0805_BLUE [mm]
  rect 1.2x1.2 smd: A(-1,0) K(1,0)
  silkscreen extent -1.83,-0.82 2.25,0.82
LED_0805_GREEN [mm]
  rect 1.2x1.2 smd: A(-1,0) K(1,0)
  silkscreen extent -1.83,-0.82 2.25,0.82
LED_0805_RED [mm]
  rect 1.2x1.2 smd: A(-1,0) K(1,0)
  silkscreen extent -1.83,-0.82 2.25,0.82
MF04 [mm]
  rect 2x2 smd: 1(-8.9,6.65) 12(8.9,6.65) 20(8.9,-6.65) 31(-8.9,-6.65)
  rect 1x2 smd: 2(-6.75,6.65) 3(-5.25,6.65) 4(-3.75,6.65) 5(-2.25,6.65) 6(-0.75,6.65) 7(0.75,6.65) 8(2.25,6.65) 9(3.75,6.65) 10(5.25,6.65) 11(6.75,6.65) 21(6.75,-6.65) 22(5.25,-6.65) 23(3.75,-6.65) 24(2.25,-6.65) 25(0.75,-6.65) 26(-0.75,-6.65) 27(-2.25,-6.65) 28(-3.75,-6.65) 29(-5.25,-6.65) 30(-6.75,-6.65)
  rect 2x1 smd: 13(8.9,4.5) 14(8.9,3) 15(8.9,1.5) 16(8.9,0) 17(8.9,-1.5) 18(8.9,-3) 19(8.9,-4.5) 32(-8.9,-4.5) 33(-8.9,-3) 34(-8.9,-1.5) 35(-8.9,0) 36(-8.9,1.5) 37(-8.9,3) 38(-8.9,4.5)
  silkscreen extent -11.45,6.35 -10.95,6.85
MH_300_275_NPTH [mm] "Non-plated mount hole M2.5 3.00mm diameter"
  round 2.1 hole 2.1 unplated mask+0: 1(0,0)
RESC1005X04N [mm] "Chip Resistor, 2-Leads, Body 1.00x0.50mm, IPC Medium Density"
  rect 0.66x0.62 smd: 1(-0.44,0) 2(0.44,0)
RESC1608X06N [mm] "Chip Resistor, 2-Leads, Body 1.55x0.80mm, IPC Medium Density"
  rect 0.95x0.95 smd: 1(-0.75,0) 2(0.75,0)
SMA_EMERSON_142_0761_861 [mil]
  rect 15x50 smd mask+0: 1(0,-25)
  rect 125x220 smd mask+0: 2(-90,-110) 2(90,-110)
  rect 320x150 smd far side: 2(0,-75)
SOD-123FL [mm] "Surface Mount Schottky Diode"
  rect 0.91x1.22 smd: A(1.64,0) K(-1.64,0)
  silkscreen extent -1.35,-0.82 1.35,0.82
SOT-23-OT5_N [mm] "SOT23, 5-Leads, Body 2.9x1.7mm, Pitch 0.95mm, Lead Span 2.8mm, IPC Medium Density"
  rect 1.1x0.65 smd: 1(-1.2,0.95) 2(-1.2,0) 3(-1.2,-0.95) 4(1.2,-0.95) 5(1.2,0.95)
  silkscreen extent -2.42,-1.55 0.25,1.62
SW_PTS810 [mm] "4-leads, 4.2x3.2mm, 400g Force, SPST-NO, 0.05A, 16V"
  rrect50% 1.2x0.65 smd: 1(-2.075,1.075) 2(2.075,1.075) 3(-2.075,-1.075) 4(2.075,-1.075)
  silkscreen extent -3.05,-1.61 2.07,2.04

## Part data
C1 C4: library part CAP0046-13, "CAP CER 10UF 10V 20% X5R 0402"
C2 C3 C5 C9 C10: library part CAP0068-11, "CAP CER 100NF 50V ±10% X7R 0402"
C6: library part CAP0086, "CAP CER 2.2UF 6.3V 20% X5R 0402"
C7 C8: library part CAP0075-12, "CAP CER 4.7UF 6.3V ±10% X5R 0402"
D1 D6: library part DIO0016-2, "LED, Red Clear,2.0V, SMD, 0805, RoHS"
D2: library part DIO0072-1, "DIODE ZENER 5.1V 500MW SOD-123"
D3: library part DIO0044-2, "DIODE SCHOTTKY 30V 500MA SOD123"
D4 D5: library part DIO0053-3, "LED GREEN 0402 SMD"
D7: library part DIO0015-2, "LED, Green Clear,2.0V, SMD, 0805, RoHS"
D8: library part DIO0018-2, "LED, Blue Clear,3.3V, SMD, 0805, RoHS"
H1: library part JCK0001-2, "Conn, SMA Jack 50 Ohm PCB Edge Mount Gold, RoHS"
H2 H3: library part HDR0128-1
H4: library part HDR0129-2, "Header for PCB; pitch 2.00mm; 2-contacts; THT; male; side entry; 100V/2A"
H5: library part HDR0131-2, "Board Connector, 4 Contact(s), 1 Row(s), Male, Straight, Surface Mount Terminal"
H6: library part HDR0006-2, "Conn Straight Header 2x1 0.100\" 2 POS"
L1: library part IND0062-6, "BEAD 60OHMS 2500MA 32 MOHM"
M1 M2 M3 M4: library part PAD0009-2, "MH NPTH 3.00mm DIA 2.75mm HOLE"
Q1: library part TSR0020-1, "Small Signal Field-Effect Transistor"
Q2: library part TSR0021-1, "Small Signal Field-Effect Transistor, 1.37A I(D), 20V, 1-Element, P-Channel, Silicon, Metal-oxide Semiconductor FET"
R1 R5 R6: library part RES0039-10, "RES SMD 0R OHM ±1% 1/16W 0402"
R2 R3 R4 R7 R8 R9 R10 R11 R12 R13 R14 R15 R17 R18 R19 R20: library part RES0002-8, "RES SMD 10K OHM ±1% 1/10W 0402"
R16 R29 R31 R32 R33 R34: library part RES0086-8, "RES SMD 47K OHM ±1% 1/16W 0402"
R21: library part RES0030-9, "RES SMD 2K OHM ±1% 1/16W 0402"
R22: library part RES0119-6, "RES SMD 0R OHM ±5% 1/10W 0603"
R23: library part RES0023-9, "RES SMD 100K OHM ±1% 1/16W 0402"
R24: library part RES0025-8, "RES SMD 330R OHM ±1% 1/16W 0402"
R25 R26 R40 R41 R42: library part RES0004-8, "RES SMD 1K OHM ±1% 1/10W 0402"
R27: library part RES0084-9, "RES SMD 470R OHM ±1% 1/16W 0402"
R28: library part RES0064, "Res, 220k Ohms, 1/16W, 1%, 0402,SMD"
R30: library part RES0124, "Res, 10K Ohm, 1/10W,+/-1%,0603 RoHS"
S1 S2: library part SWH0026-1, "SWITCH TACTILE SPST-NO 0.05A 16V"
U1: library part MOD0010-3, "MM61xx-MF08"
U2: library part ICT0232-1, "Power Supply Support Circuit, Adjustable, 1 Channel, PDSO5"
U4: library part ICT0108-3, "IC, Humidity Temperature Sensor 0 ~ 100% RH I²C ±1.8% RH 6 s Surface Mount"

## Via types
v1: diameter 23.62, hole 11.81, Top Layer to Bottom Layer, tented both sides, 151 vias